# Altium PCB mc2833p1.PcbDoc
Units mm, origin at the board's own origin, x right, y up, seen from the top; angles counter-clockwise.
Board outline 50 x 50 mm, 2 copper layers (Top Layer, Bottom Layer); 36 components, 22 nets, 87 pads, 0 vias.
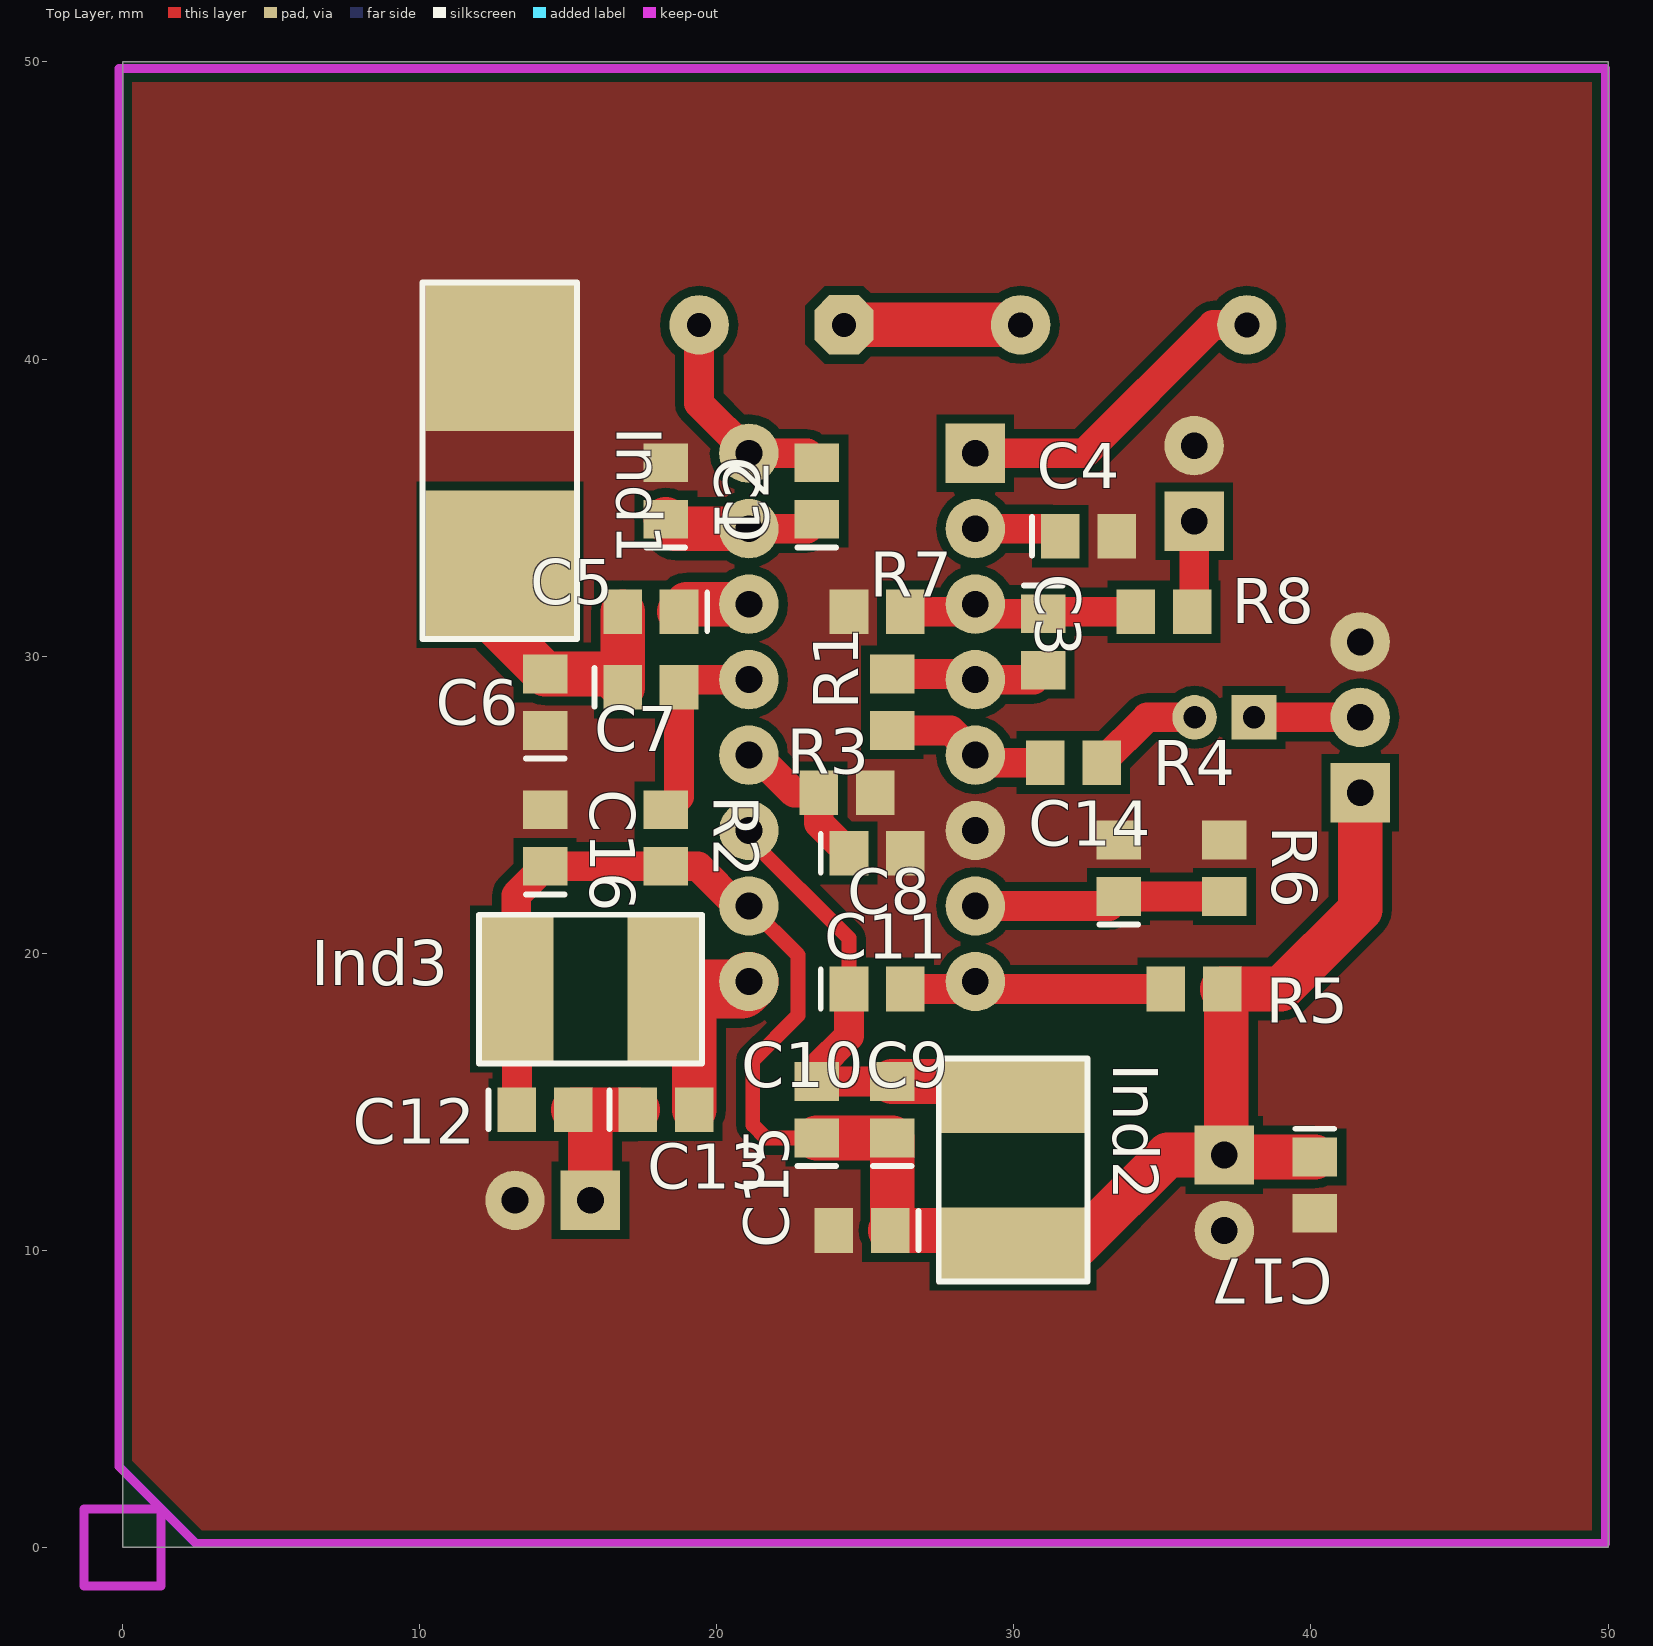
[diagram p0: Top Layer view]
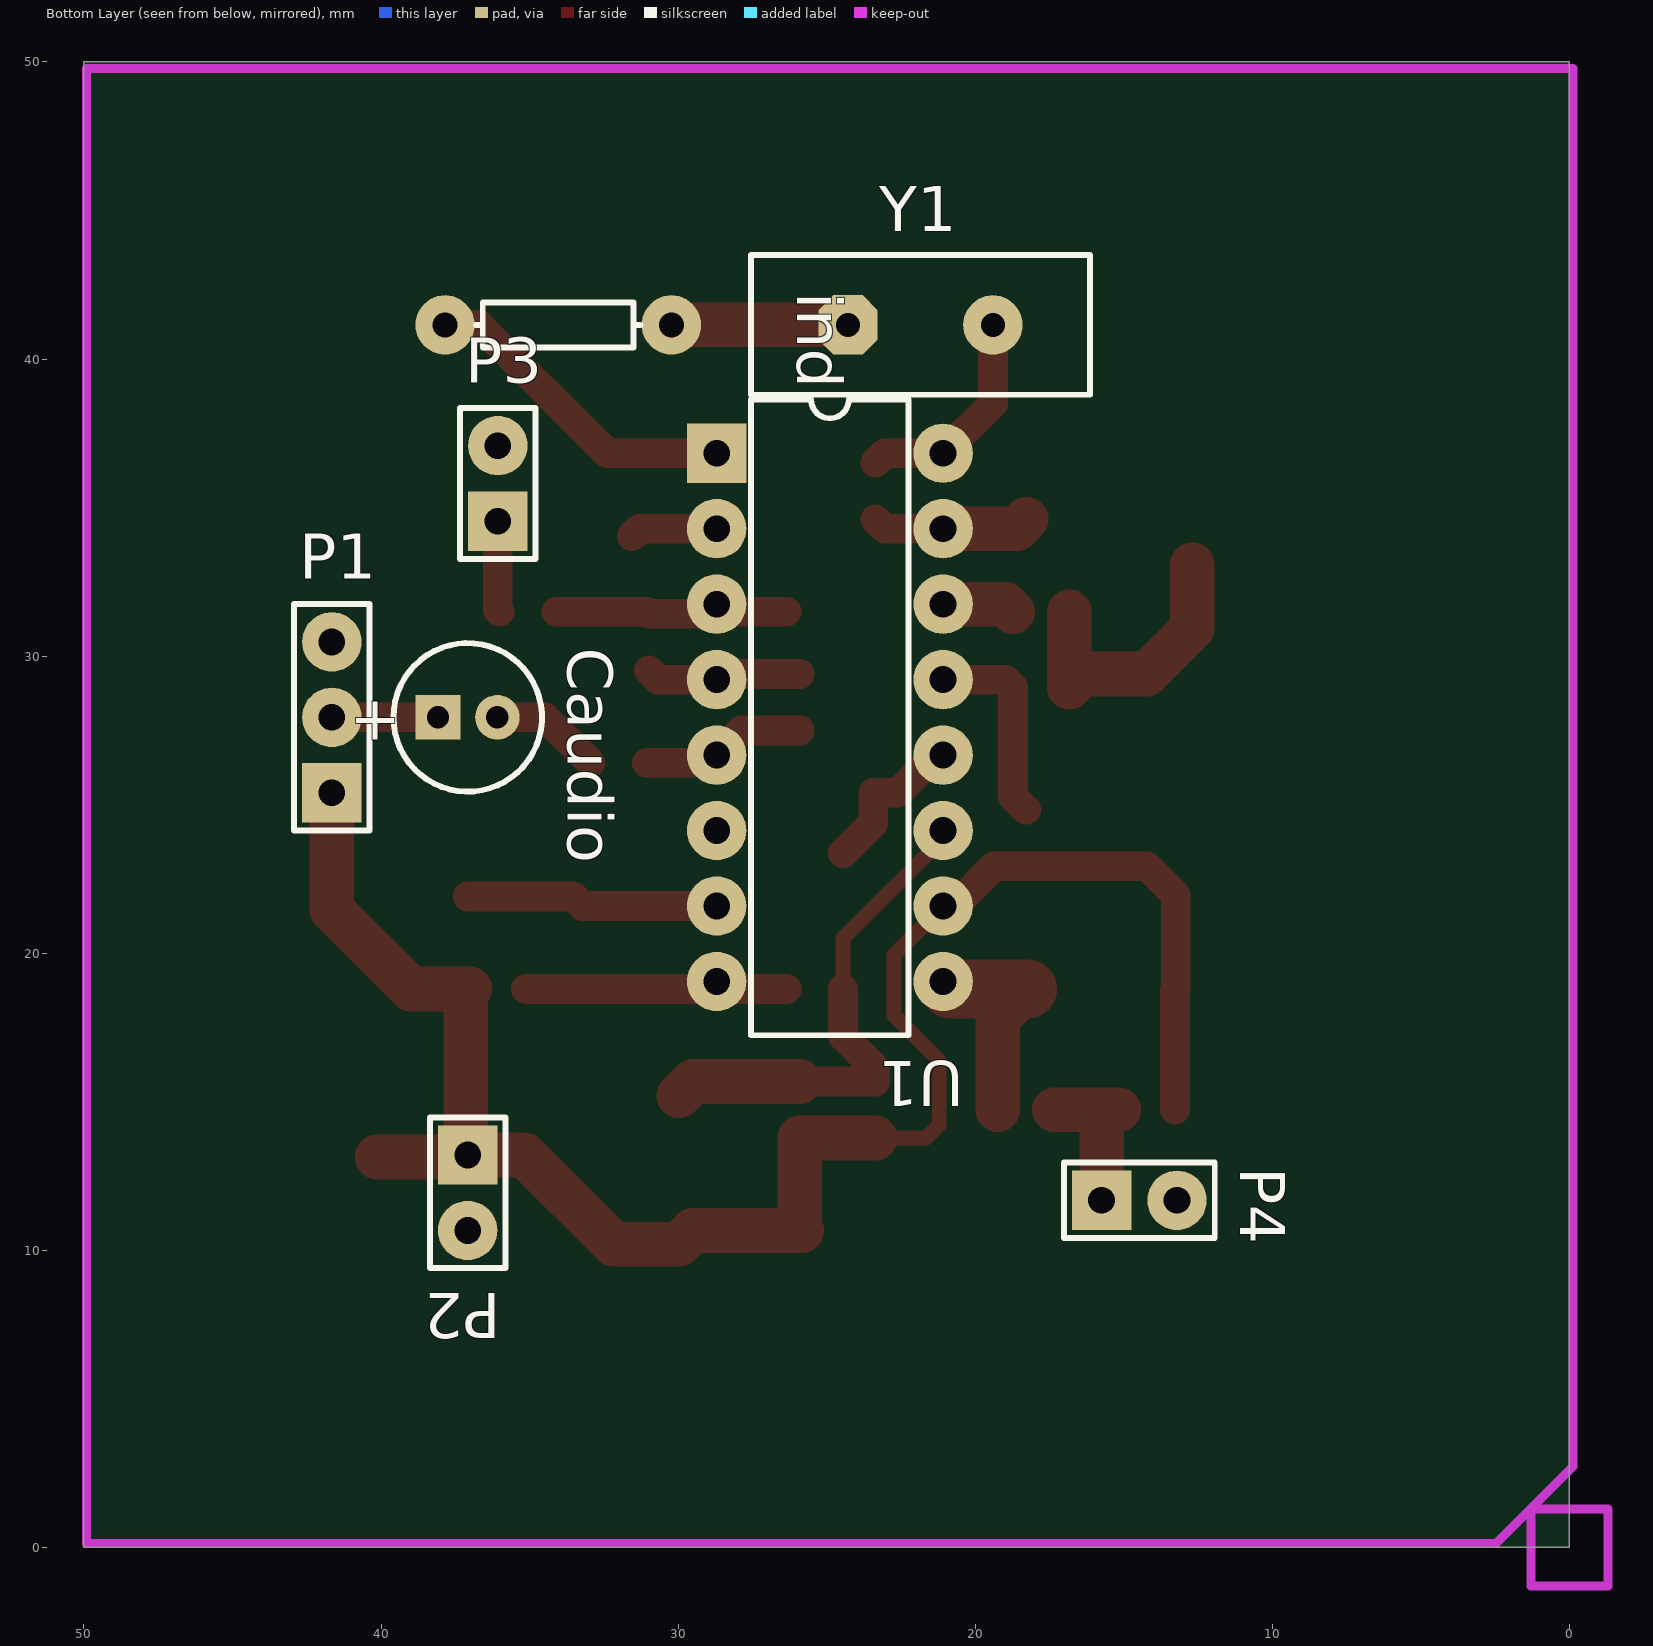
[diagram p1: Bottom Layer view, seen from below]

## Layer stack, top to bottom
Top Layer: signal copper 0.0356
Dielectric: dielectric 0.32, FR-4, Dk 4.8
Bottom Layer: signal copper 0.0356

## Board outline
0,0 50,0 50,50 0,50

## Design rules (kind name [scope] priority, off if disabled: settings)
Clearance [All] p1: gap=0.3
ComponentClearance [All] p1: gap=0.254 collisioncheckmode=3 verticalgap=0.254
HoleSize [All] p1: absolutevalues=TRUE maxlimit=2.54 minlimit=0.025 maxpercent=80.000 minpercent=20.000
PolygonConnect [All] p1: connectstyle=Direct reliefconductorwidth=0.254 reliefentries=4 polygonreliefangle="90 Angle"
RoomDefinition TX_FM [InComponentClass('TX_FM')] p1: confinementstyle=ConfineIn formatcopy=TRUE lockcomponents=FALSE outline -0.254,-0.381 50.292,-0.381 50.292,50.419 -0.254,50.419
RoutingVias [All] p1: holewidth=0.6 width=2 viastyle="Through Hole" minholewidth=0.711 minwidth=1.27 maxholewidth=1 maxwidth=2
SolderMaskExpansion [All] p1: expansion=0.102
TestPointUsage [All] p1: valid=0 allowmultiple=FALSE
Testpoint [All] p1: side=15 testpointundercomponent=TRUE minsize=1.016 maxsize=2.54 preferedsize=1.524 minholesize=0 maxholesize=1.016 preferedholesize=0.813 testpointgrid=0.025 style=1023 order=0-112345678
Width [All] p1: maxlimit=3 minlimit=0.2 preferedwidth=1.5
17 further rules are at their usual default settings.

## Components (designator, comment, footprint, x,y, rotation, side; value= is the part's Value field where it differs from the comment)
C1 "Cap Pol3" C0805 18.288,35.56 r90 top
C2 "Cap Pol3" C0805 23.368,35.56 r90 top
C3 "Cap Pol3" C0805 30.988,30.48 r270 top
C4 "Cap Pol3" C0805 32.512,34.036 r0 top
C5 "Cap Pol3" C0805 17.78,31.496 r180 top
C6 "Cap Pol3" C0805 14.224,28.448 r90 top
C7 "Cap Pol3" C0805 17.78,28.956 r0 top
C8 "Cap Pol3" C0805 25.4,23.368 r0 top
C9 "Cap Pol3" C0805 25.908,14.732 r90 top
C10 "Cap Pol3" C0805 23.368,14.732 r90 top
C11 "Cap Pol3" C0805 25.4,18.796 r0 top
C12 "Cap Pol3" C0805 14.224,14.732 r0 top
C13 "Cap Pol3" C0805 18.288,14.732 r0 top
C14 "Cap Pol3" C0805 33.528,22.86 r90 top
C15 "Cap Pol3" C0805 24.892,10.668 r180 top
C16 "Cap Pol3" C0805 14.224,23.876 r90 top
C17 "Cap Pol3" C0805 40.132,12.192 r270 top
Caudio "Cap Pol1" B 37.084,27.94 r180 bottom
ind "Res1" AXIAL-0.3 34.036,41.148 r180 bottom
Ind1 "Ind2" IND_7MM 12.7,36.576 r270 top
Ind2 "Ind2" Ind_5mm 29.972,12.7 r270 top
Ind3 "Ind2" Ind_5mm 15.748,18.796 r180 top
P1 "Audio" HDR1X3 41.656,25.4 r90 bottom
P2 "Header 2" HDR1X2 37.084,13.208 r270 bottom
P3 "Header 2" HDR1X2 36.068,34.544 r90 bottom
P4 "Header 2" HDR1X2 15.748,11.684 r180 bottom
R1 "Res Semi" 2012[0805] 25.908,28.448 r90 top
R2 "Res Semi" 2012[0805] 18.288,23.876 r270 top
R3 "Res Semi" 2012[0805] 24.384,25.4 r0 top
R4 "Res Semi" 2012[0805] 32.004,26.416 r0 top
R5 "Res Semi" 2012[0805] 36.068,18.796 r180 top
R6 "Res Semi" 2012[0805] 37.084,22.86 r270 top
R7 "Res Semi" 2012[0805] 25.4,31.496 r180 top
R8 "Res Semi" 2012[0805] 35.052,31.496 r180 top
U1 "MC2833P" 648-06 24.892,27.94 r270 bottom
Y1 "ECS-10-13-1" HC-49U 21.844,41.148 r180 bottom

## Footprints (in the part's own frame and the unit in brackets; to place one, negate y for a bottom-side part, rotate by r counter-clockwise, add the part's x,y. Pads: shape width x height; smd on the part's side, far side on the other; paste and mask are expansions set on the pad)
648-06 [mm] "DIP; 16 Leads; Row Spacing 7.62 mm; Pitch 2.54 mm"
  rect 2x2 hole 0.9: 1(-8.89,-3.81)
  round 2 hole 0.9: 2(-6.35,-3.81) 3(-3.81,-3.81) 4(-1.27,-3.81) 5(1.27,-3.81) 6(3.81,-3.81) 7(6.35,-3.81) 8(8.89,-3.81) 9(8.89,3.81) 10(6.35,3.81) 11(3.81,3.81) 12(1.27,3.81) 13(-1.27,3.81) 14(-3.81,3.81) 15(-6.35,3.81) 16(-8.89,3.81)
  silkscreen extent -10.7,-2.65 10.7,2.65
2012[0805] [mm] "Chip Resistor; Body 2.0 x 1.3 mm (LxW typ)"
  rect 1.3x1.5 smd: 1(-0.95,0) 2(0.95,0)
AXIAL-0.3 [mm] "Resistor; 2 Leads"
  round 2 hole 0.85: 1(-3.81,0) 2(3.81,0)
  silkscreen extent -2.77,-0.76 2.77,0.76
B [mm] "Capacitor, Electrolytic, Radial; Body 5 x 6.8 mm (Dia.xH typ); Pin Spacing 2 mm (typ)"
  rect 1.5x1.5 hole 0.75: 1(-1,0)
  round 1.5 hole 0.75: 2(1,0)
  silkscreen extent -2.5,-2.5 2.5,2.5
C0805 [mm] "Chip Capacitor; Body 2.0 x 1.2 mm (LxW typ)"
  rect 1.3x1.5 smd: 1(-0.95,0) 2(0.95,0)
  silkscreen extent -1.9,-0.65 -1.9,0.65
HC-49U [mm] "Quartz Crystal, Thru-Hole; 2 Leads; Body 11.35 x 4.65 x 13.46 mm (LxWxH max)"
  oct 2x2 hole 0.8: 1(-2.44,0)
  round 2 hole 0.8: 2(2.44,0)
  silkscreen extent -5.7,-2.35 5.7,2.35
HDR1X2 [mm] "Connector; Header; 2 Position"
  rect 2x2 hole 0.9: 1(0,0)
  round 2 hole 0.9: 2(2.54,0)
  silkscreen extent -1.27,-1.27 3.81,1.27
HDR1X3 [mm] "Connector; Header; 3 Position"
  rect 2x2 hole 0.9: 1(0,0)
  round 2 hole 0.9: 2(2.54,0) 3(5.08,0)
  silkscreen extent -1.27,-1.27 6.35,1.27
Ind_5mm [mm]
  rect 2.5x5 smd: 1(-2.5,0) 2(2.5,0)
  silkscreen extent -3.75,-2.5 3.75,2.5
IND_7MM [mm]
  rect 5x5 smd: 1(-3.5,0) 2(3.5,0)
  silkscreen extent -6,-2.6 6,2.6

## Part data
C1 C2 C3 C4 C5 C6 C7 C8 C9 C10 C11 C12 C13 C14 C15 C16 C17: "Polarized Capacitor (Surface Mount)"
Caudio: "Polarized Capacitor (Radial)"
ind: library part "Res Semi", "Semiconductor Resistor"
P1: library part "Header 3", "Header, 3-Pin"
P2 P3 P4: "Header, 2-Pin"
R1 R2 R3 R4 R5 R6 R7 R8: "Semiconductor Resistor"
U1: "Low Power FM Transmitter System"
Y1: library part XTAL, "Crystal Oscillator"

## Nets (pads, with @x,y where several pads share a name; then routed paths per layer and width w, separated by ;. In a path a pad name is that pad's centre, name@x,y a point inside that pad or via, vN(x,y) a via of type N, cw(c..) or ccw(c..) an arc to the next point about the centre after c; other vN are vias at no path point)
GND: C1.2 C4.2 C6.1 C8.2 C14.2 C15.2 C16.2 C17.2 Ind1.1 P1.3 P2.2 P3.2 P4.2 R3.2 R6.1 R7.2 U1.6
NetC1_1: C1.1 C2.1 U1.15 | length 5.8
  Top Layer w1: U1.15@21.402,34.61 U1.15 23.048,34.29 C2.1
  Top Layer w1.5: C1.1 18.608,34.29 U1.15
NetC2_2: C2.2 U1.16 Y1.2 | length 7.4
  Top Layer w1: Y1.2 19.404,38.508 U1.16 23.048,36.83 C2.2
NetC3_1: C3.1 R7.1 R8.2 U1.3 | length 8.4
  Top Layer w1: R7.1 28.448,31.496 U1.3 ; U1.3@28.448,32.004 29.022,31.43 C3.1 31.054,31.496 R8.2
NetC3_2: C3.2 R1.2 U1.4 | length 5.3
  Top Layer w1: R1.2 28.514,29.398 U1.4 30.668,29.21 C3.2
NetC4_1: C4.1 U1.2 | length 3
  Top Layer w1: U1.2 31.308,34.29 C4.1
NetC5_1: C5.1 U1.14 | length 2.8
  Top Layer w1: U1.14@20.828,31.496 U1.14
  Top Layer w1.5: C5.1 18.984,31.75 U1.14
NetC5_2: C5.2 C6.2 C7.1 Ind1.2 | length 9.6
  Top Layer w1.5: Ind1.2 12.7,30.922 C6.2 16.388,29.398 C7.1 C5.2
NetC7_2: C7.2 R2.1 U1.13 | length 7.1
  Top Layer w1: R2.1 18.73,25.268 C7.2 18.984,29.21 U1.13 U1.13@20.828,28.956
NetC8_1: C8.1 R3.1 U1.12 | length 5.3
  Top Layer w1: U1.12 21.336,26.67 22.352,25.654 22.606,25.4 R3.1 23.434,24.384 C8.1
NetC9_2: C9.2 C10.2 C11.1 Ind2.1 U1.11 | length 17.1
  Top Layer w0.5: U1.11 21.082,23.876 24.45,20.508 C11.1
  Top Layer w1: C11.1 24.45,17.211 23.368,16.129 C10.2 C9.2
  Top Layer w1.5: C9.2 29.49,15.682 Ind2.1
NetC11_2: C11.2 R5.2 U1.8 | length 9
  Top Layer w1: C11.2 28.448,18.796 U1.8 28.956,18.796 R5.2
NetC12_2: C12.2 C13.1 P4.1 | length 5.2
  Top Layer w1.5: C12.2 C13.1 ; P4.1 C12.2@15.748,14.732
NetC13_2: C13.2 Ind3.1 U1.9 | length 7.4
  Top Layer w1.5: Ind3.1 19.238,17.806 C13.2
  Top Layer w2: Ind3.1 20.828,18.796 U1.9
NetC14_1: C14.1 R6.2 U1.7 | length 8.5
  Top Layer w1: U1.7 33.208,21.59 C14.1 R6.2
NetCaudio_1: Caudio.1 P1.2 | length 3.6
  Top Layer w1: Caudio.1 P1.2
NetCaudio_2: Caudio.2 R4.2 | length 3.8
  Top Layer w1: R4.2 34.478,27.94 Caudio.2
Netind_1: ind.1 U1.1 | length 10.9
  Top Layer w1: U1.1 32.385,36.83 36.703,41.148 ind.1
Netind_2: ind.2 Y1.1 | length 5.9
  Top Layer w1.5: Y1.1 ind.2
NetP3_1: P3.1 R8.1 | length 3.1
  Top Layer w1: R8.1 36.068,31.562 P3.1
NetR1_1: R1.1 R4.1 U1.5 | length 5.6
  Top Layer w1: R1.1 27.874,27.498 28.956,26.416 R4.1
VCC: C9.1 C10.1 C12.1 C15.1 C16.1 C17.1 Ind2.2 Ind3.2 P1.1 P2.1 R2.2 R5.1 U1.10 | length 63.9
  Top Layer w0.5: U1.10 22.733,19.939 22.733,17.907 21.209,16.383 21.209,14.224 21.651,13.782 C10.1
  Top Layer w1: C12.1 13.274,18.77 Ind3.2 13.248,21.95 C16.1 R2.2 19.365,22.926 20.701,21.59 U1.10
  Top Layer w1.5: C10.1 C9.1 25.908,10.734 C15.1 29.504,10.668 Ind2.2 32.171,10.2 35.179,13.208 P2.1 P2.1@37.15,13.142 ; C17.1 P2.1@37.15,13.142 ; P1.1 41.656,21.463 38.989,18.796 R5.1 37.15,18.664 P2.1@37.15,13.142

## Polygon pours and split planes (outlines as drawn)
GND on Top Layer (solid, remove dead copper): -1.524,52.07 -1.524,-2.159 52.832,-2.159 52.832,52.324

## Keep-outs
Keep-Out Layer:
  lines w0.3: 1.3,1.3 1.3,-1.3 -1.3,-1.3 -1.3,1.3 1.3,1.3 ; 1.3,1.3 -0.127,2.727 -0.127,49.784 49.911,49.784 49.911,0.127 2.473,0.127 1.3,1.3

## Silkscreen, mask and mechanical layers (free items; w line width, h text height)
Drill Drawing:
  text ".LEGEND" at 55.08,5.08 h1.52
  text "Drill Drawing." at 55.08,2.54 h1.52

## Dimensions
0,0 to -0.127,2.727 on Mechanical 1
0,0 to 2.473,0.127 on Mechanical 1

## Text inside footprints (layer, text, board x,y; h text height)
Caudio: Bottom Overlay "+" at 41.059,27.19 h1.5